# Altium PCB Board_QFP.PcbDoc (part 1 of 4)
Units mm, origin at the board's own origin, x right, y up, seen from the top; angles counter-clockwise.
Board outline 237 x 100 mm, 2 copper layers (Top Layer, Bottom Layer); 389 components, 358 nets, 1412 pads, 469 vias.
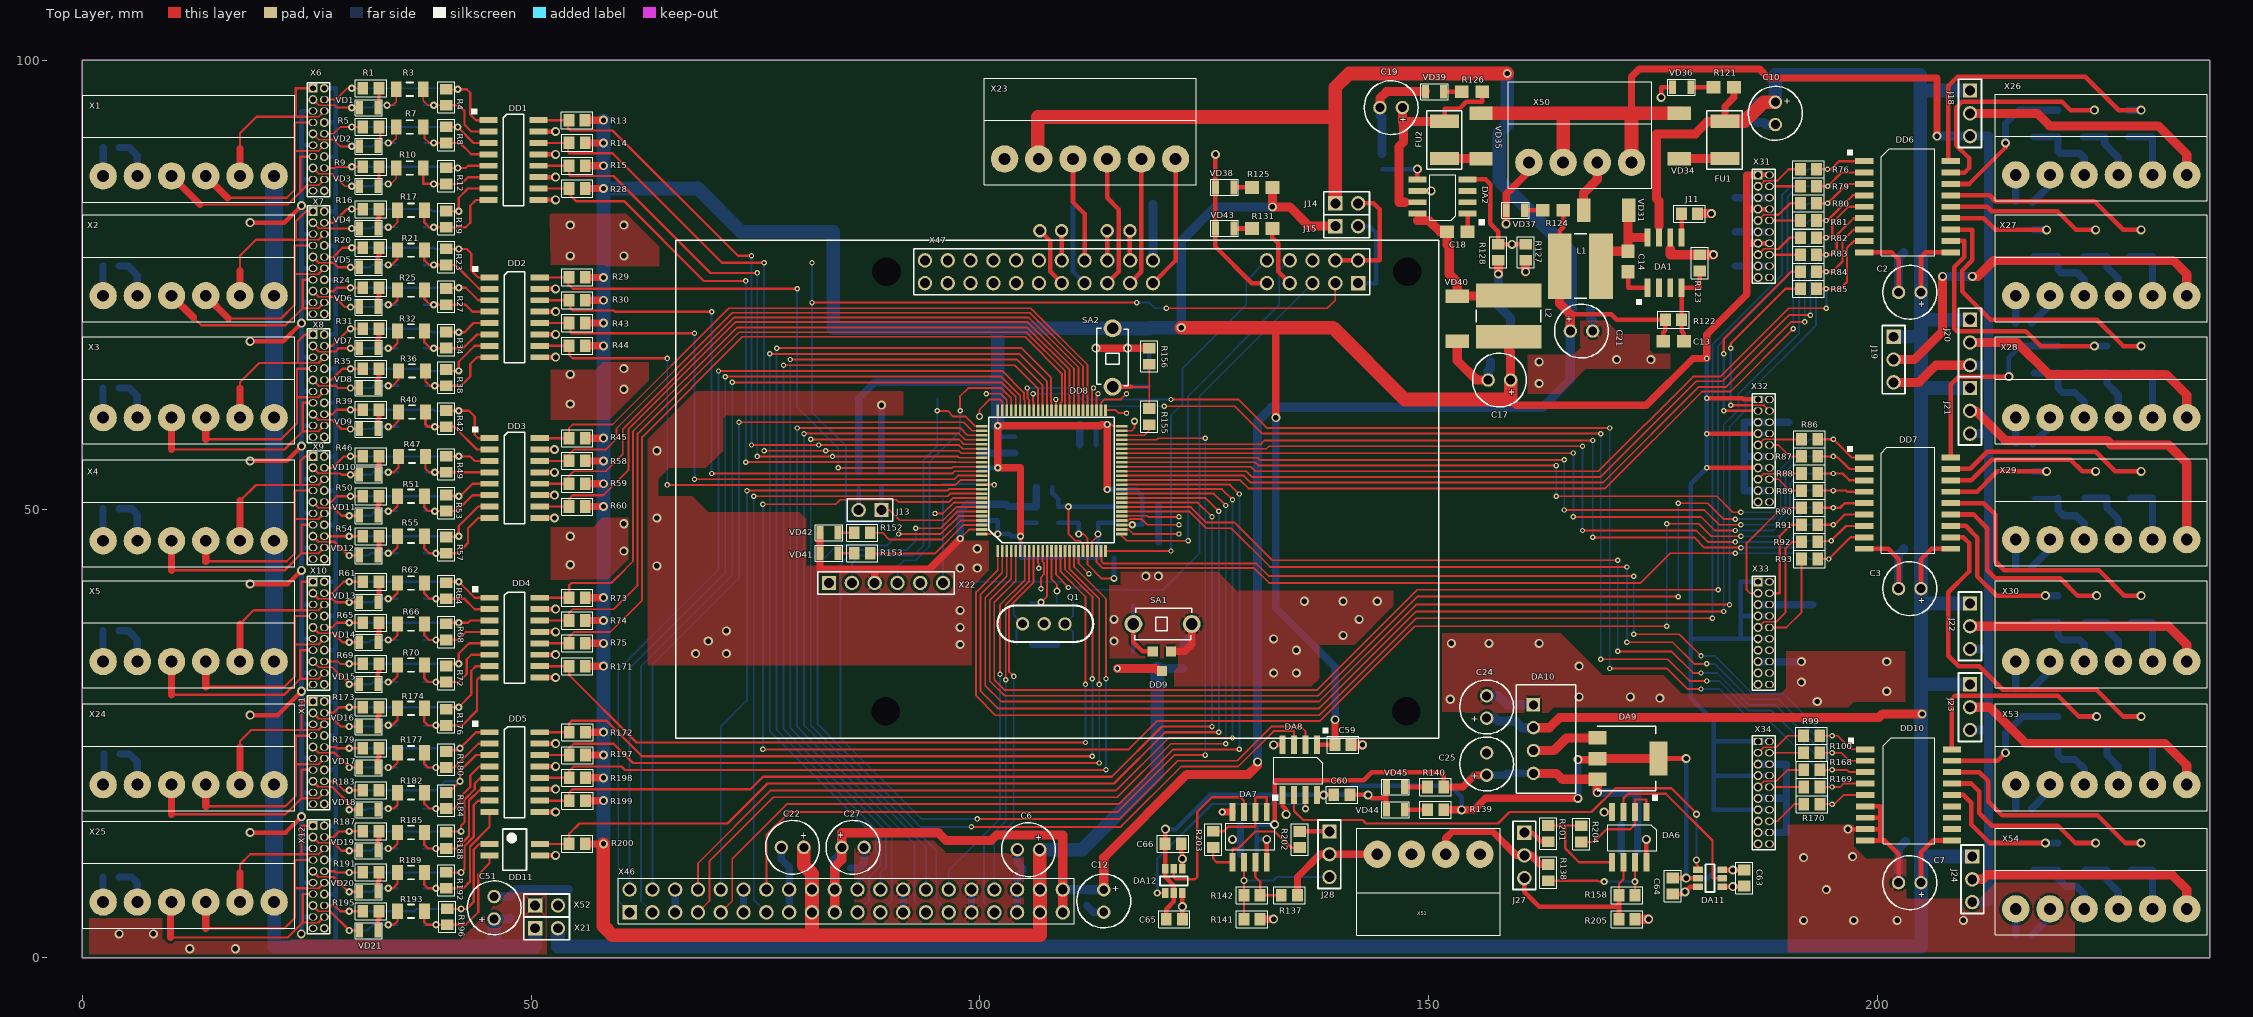
[diagram p0: Top Layer view]
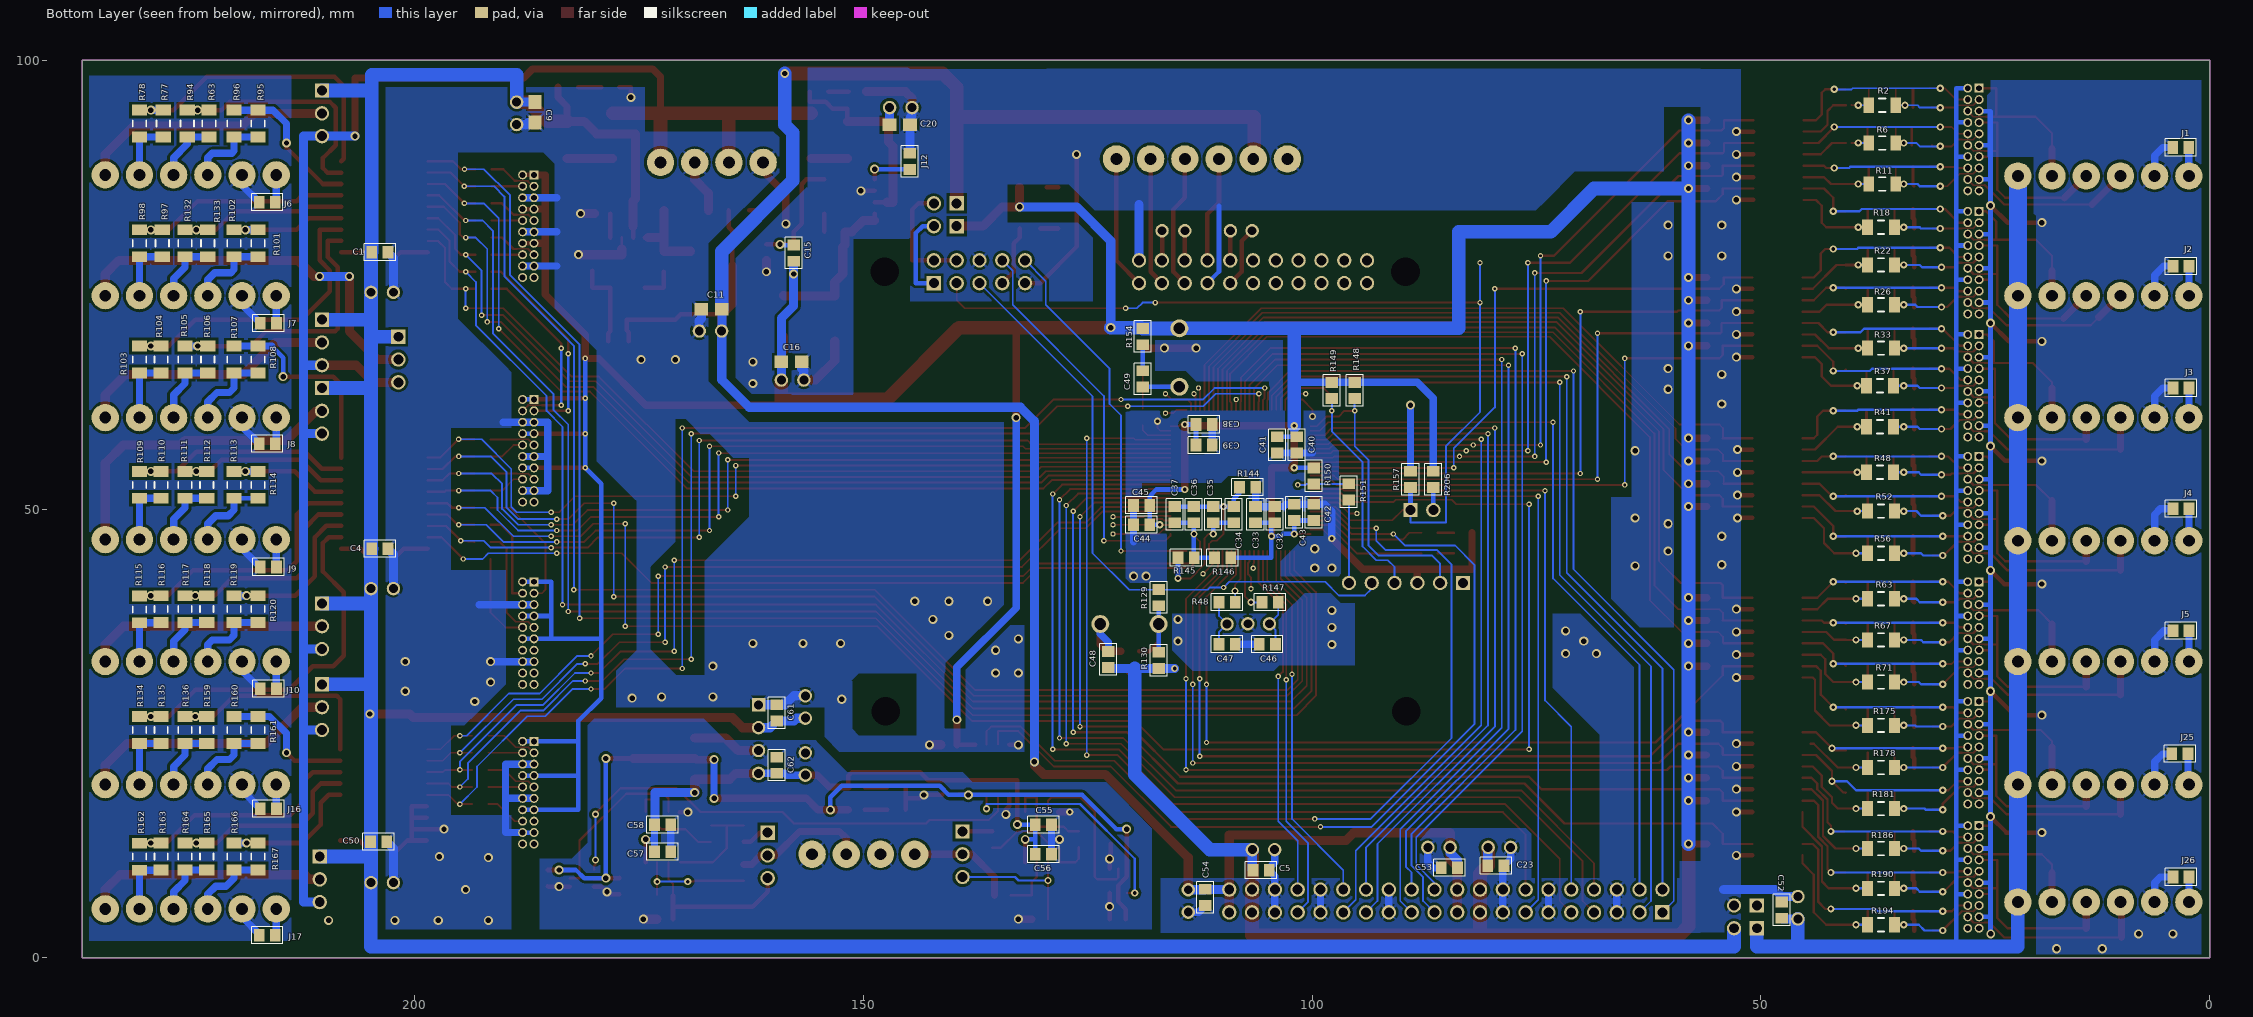
[diagram p1: Bottom Layer view, seen from below]
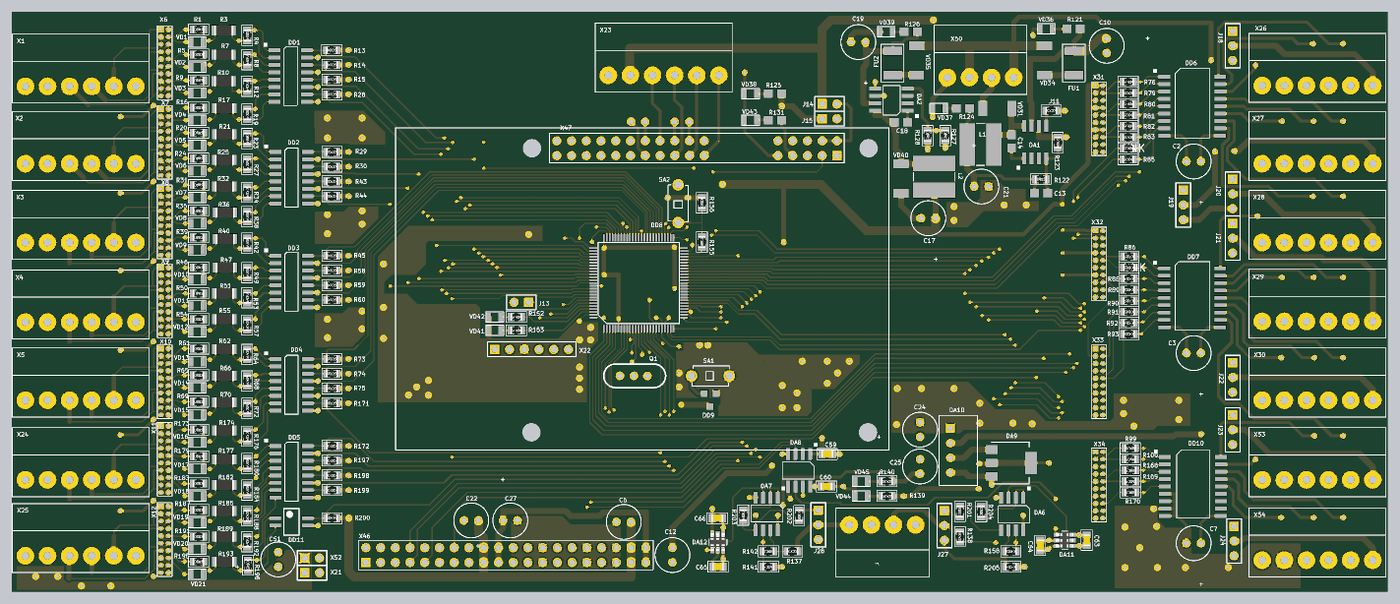
[diagram p5: 3D render of the assembled board from above, using the file's embedded part models]
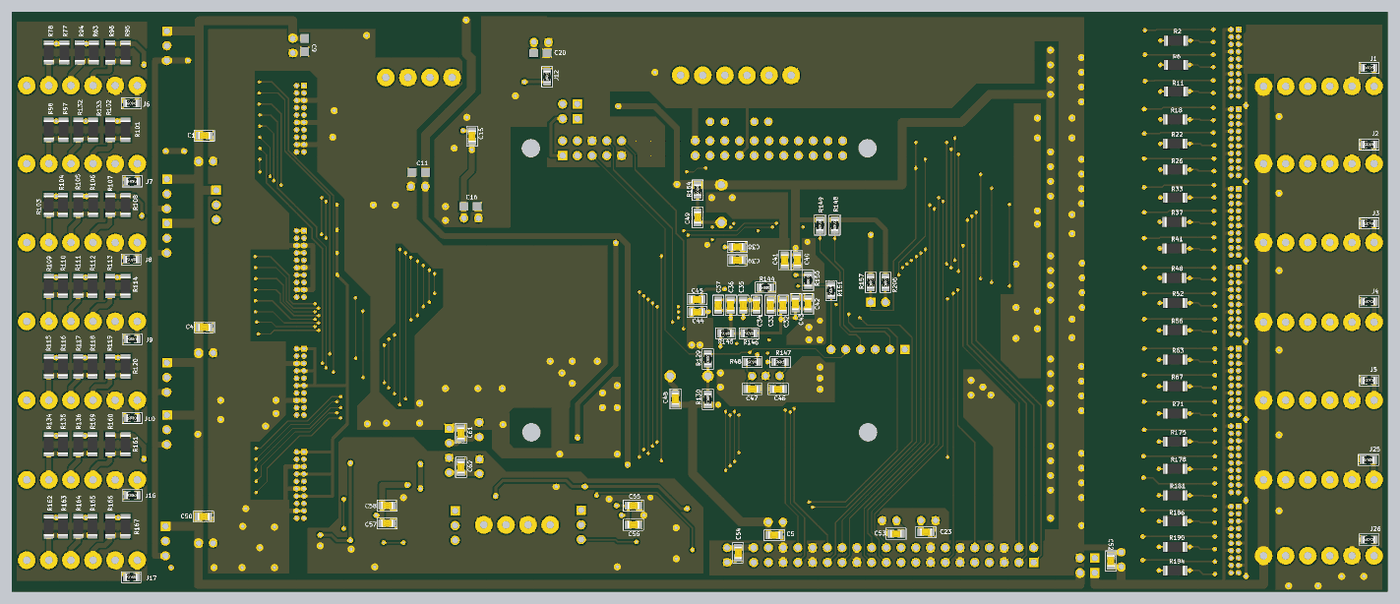
[diagram p6: 3D render of the assembled board from below, using the file's embedded part models]

## Layer stack, top to bottom
Top Solder: solder mask 0.0102, Solder Resist, Dk 3.5
Top Layer: signal copper 0.0356
Dielectric 1: dielectric 0.32, FR-4, Dk 4.8
Bottom Layer: signal copper 0.0356
Bottom Solder: solder mask 0.0102, Solder Resist, Dk 3.5

## Board outline
0,0 237,0 237,100 0,100

## Design rules (kind name [scope] priority, off if disabled: settings)
Clearance Clearance_Pol [Inpolygon] p1: gap=0.3
Clearance [All] p2: gap=0.15
ComponentClearance [All] p1: gap=0.2 collisioncheckmode=3 verticalgap=0.254 showdistances=FALSE
HoleSize [All] p1: absolutevalues=TRUE maxlimit=3.5 minlimit=0.25 maxpercent=80.000 minpercent=20.000
HoleToHoleClearance [All] p1: gap=0.2 allowstackedmicrovias=TRUE
MinimumSolderMaskSliver [All] p1: minsoldermaskwidth=0.1
MinimumSolderMaskSliver SilkscreenOverComponentPads [All] p2: minsoldermaskwidth=0.254
PlaneClearance [All] p1: clearance=0.305
PlaneConnect [All] p1: planeconnectstyle=Relief reliefexpansion=0.508 reliefentries=4 reliefconductorwidth=0.305 reliefairgap=0.254
PolygonConnect PolygonConnect_Via [IsVia] p1: connectstyle=Direct reliefconductorwidth=0.254 reliefentries=4 polygonreliefangle="90 Angle" airgapwidth=0.254
PolygonConnect [All] p2: connectstyle=Relief reliefconductorwidth=0.305 reliefentries=4 polygonreliefangle="45 Angle" airgapwidth=0.254
RoutingVias [All] p1: holewidth=0.4 width=0.8 viastyle="Through Hole" minholewidth=0.3 minwidth=0.6 maxholewidth=0.6 maxwidth=1
ShortCircuit [All] p1: allowed=TRUE
SilkToSilkClearance [All] p1: silktosilkclearance=0.102
SolderMaskExpansion [All] p1: expansion=0.1
Width [All] p1: maxlimit=2 minlimit=0.12 preferedwidth=0.2 minimp=50.000000 maximp=50.000000 favimp=50.000000
22 further rules are at their usual default settings.

## Components (designator, comment, footprint, x,y, rotation, side; value= is the part's Value field where it differs from the comment)
C1 "Comment" SMD0805CAP 204.872,78.618 r180 bottom
C2 "Comment" cap6 203.602,74.173 r180 top
C3 "Comment" cap6 203.602,41.153 r180 top
C4 "Comment" SMD0805CAP 204.872,45.598 r180 bottom
C5 "Comment" SMD0805CAP 106.68,9.779 r180 bottom
C6 "Comment" cap6 105.41,12.065 r180 top
C7 "Comment" cap6 203.602,8.387 r180 top
C9 "" RC0805 186.584,95.382 r270 bottom
C10 "Comment" cap6 188.616,94.112 r270 top
C11 "" RC0805 165.756,72.268 r0 bottom
C12 "Comment" cap6 113.792,6.35 r270 top
C13 "" RC0805 176.149,68.707 r0 top
C14 "" RC0805 172.212,76.454 r90 top
C15 "Comment" SMD0805CAP 157.757,79.532 r270 bottom
C16 "" RC0805 159.152,66.426 r180 bottom
C17 "Comment" cap6 157.882,64.394 r180 top
C18 "" RC0805 154.326,80.904 r180 top
C19 "Comment" cap6 145.817,94.747 r180 top
C20 "" RC0805 147.087,92.842 r180 bottom
C21 "Comment" cap6 167.026,69.855 r0 top
C22 "Comment" cap6 79.121,12.319 r180 top
C23 "Comment" SMD0805CAP 80.518,10.287 r180 bottom
C24 "Comment" cap6 156.459,27.961 r90 top
C25 "Comment" cap6 156.459,21.611 r90 top
C27 "Comment" cap6 85.852,12.319 r0 top
C32 "Comment" SMD0805CAP 104.14,48.387 r90 bottom
C33 "Comment" SMD0805CAP 106.299,48.387 r90 bottom
C34 "Comment" SMD0805CAP 108.712,48.387 r90 bottom
C35 "Comment" SMD0805CAP 110.998,48.387 r90 bottom
C36 "Comment" SMD0805CAP 113.157,48.387 r90 bottom
C37 "Comment" SMD0805CAP 115.316,48.387 r90 bottom
C38 "Comment" SMD0805CAP 113.03,59.436 r180 bottom
C39 "Comment" SMD0805CAP 113.03,57.15 r180 bottom
C40 "Comment" SMD0805CAP 101.727,58.166 r270 bottom
C41 "Comment" SMD0805CAP 103.886,58.166 r270 bottom
C42 "Comment" SMD0805CAP 99.822,48.641 r90 bottom
C43 "Comment" SMD0805CAP 101.981,48.641 r90 bottom
C44 "Comment" SMD0805CAP 117.983,48.26 r0 bottom
C45 "Comment" SMD0805CAP 117.983,50.419 r0 bottom
C46 "Comment" SMD0805CAP 103.984,34.951 r0 bottom
C47 "Comment" SMD0805CAP 110.461,34.951 r180 bottom
C48 "Comment" SMD0805CAP 122.682,32.258 r90 bottom
C49 "Comment" SMD0805CAP 118.872,65.532 r270 bottom
C50 "Comment" SMD0805CAP 204.999,12.959 r180 bottom
C51 "Comment" cap6 45.868,5.593 r90 top
C52 "Comment" SMD0805CAP 47.646,4.323 r90 bottom
C53 "Comment" SMD0805CAP 83.693,10.033 r0 bottom
C54 "Comment" SMD0805CAP 111.887,7.747 r270 bottom
C55 "Comment" SMD0805CAP 130.937,14.859 r180 bottom
C56 "Comment" SMD0805CAP 130.937,11.557 r180 bottom
C57 "Comment" SMD0805CAP 173.355,11.811 r180 bottom
C58 "Comment" SMD0805CAP 173.355,14.859 r180 bottom
C59 "Comment" SMD0805CAP 139.446,23.749 r0 top
C60 "Comment" SMD0805CAP 139.319,18.161 r0 top
C61 "Comment" SMD0805CAP 159.634,26.31 r90 bottom
C62 "Comment" SMD0805CAP 159.634,20.468 r90 bottom
C63 "Comment" SMD0805CAP 185.166,9.906 r270 top
C64 "Comment" SMD0805CAP 177.165,9.017 r270 top
C65 "Comment" SMD0805CAP 120.65,4.318 r0 top
C66 "Comment" SMD0805CAP 120.523,12.7 r0 top
DA1 "" SO8 174.371,74.676 r90 top
DA2 "" SO8 154.326,82.936 r180 top
DA6 "" SO8 174.244,16.256 r270 top
DA7 "" SO8 131.953,16.256 r270 top
DA8 "" SO8 137.541,23.749 r270 top
DA9 "Comment" SOT23 168.783,24.511 r270 top
DA10 "Comment" sip4 161.671,28.194 r270 top
DA11 "Comment" SOT23-6 181.356,8.89 r0 top
DA12 "Comment" SOT23-6 121.6,8.589 r90 top
DD1 "Comment" SO16 45.233,93.35 r0 top
DD2 "Comment" SO16 45.36,75.824 r0 top
DD3 "Comment" SO16 45.36,57.917 r0 top
DD4 "Comment" SO16 45.36,40.137 r0 top
DD5 "Comment" SO16 45.36,25.151 r0 top
DD6 "" SOL18 198.522,88.778 r0 top
DD7 "" SOL18 198.522,55.758 r0 top
DD8 "Comment" "LQFP100 - duplicate" 107.981,53.239 r90 top
DD9 "" SOT-23 121.285,34.163 r180 top
DD10 "" SOL18 198.649,23.246 r0 top
DD11 "Comment" SOIC4 48.154,12.07 r0 top
FU1 "" MSMF020 183.007,93.218 r270 top
FU2 "" MSMF020 151.765,93.218 r270 top
J1 "Comment" SMD0805RES 4.212,90.302 r180 bottom
J2 "Comment" SMD0805RES 2.18,77.094 r0 bottom
J3 "Comment" SMD0805RES 2.18,63.505 r0 bottom
J4 "Comment" SMD0805RES 2.18,50.043 r0 bottom
J5 "Comment" SMD0805RES 2.18,36.454 r0 bottom
J6 "Comment" SMD0805RES 215.413,84.206 r0 bottom
J7 "Comment" SMD0805RES 215.286,70.744 r0 bottom
J8 "Comment" SMD0805RES 215.413,57.282 r0 bottom
J9 "Comment" SMD0805RES 215.286,43.566 r0 bottom
J10 "Comment" SMD0805RES 215.286,29.977 r0 bottom
J11 "Comment" SMD0805RES 178.054,82.931 r0 top
J12 "Comment" SMD0805RES 144.801,87.762 r90 bottom
J13 "Comment" PLS2 89.027,49.911 r180 top
J14 "Comment" PLS2 139.594,84.079 r0 top
J15 "Comment" PLS2 139.594,81.539 r0 top
J16 "Comment" SMD0805RES 215.286,16.642 r0 bottom
J17 "Comment" SMD0805RES 215.413,2.545 r0 bottom
J18 "Comment" HDR1X3 210.312,96.647 r270 top
J19 "Comment" HDR1X3 201.803,69.215 r270 top
J20 "Comment" HDR1X3 210.312,71.12 r270 top
J21 "Comment" HDR1X3 210.312,63.5 r270 top
J22 "Comment" HDR1X3 210.312,39.497 r270 top
J23 "Comment" HDR1X3 210.312,30.48 r270 top
J24 "Comment" HDR1X3 210.566,11.303 r270 top
J25 "Comment" SMD0805RES 2.307,22.738 r0 bottom
J26 "Comment" SMD0805RES 2.18,9.022 r0 bottom
J27 "Comment" HDR1X3 160.655,13.97 r270 top
J28 "Comment" HDR1X3 138.938,14.097 r270 top
L1 "Comment" cdrh6d38np 164.592,77.089 r0 top
L2 "Comment" cdrh6d38np 158.898,69.22 r90 top
Q1 "" HC49_S 104.746,37.237 r270 top
R1 "Comment" SMD0805RES 31.136,96.906 r0 top
R2 "Comment" RES1206 36.47,95.001 r0 bottom
R3 "Comment" RES1206 36.47,96.779 r0 top
R4 "Comment" SMD0805RES 40.534,96.906 r270 top
R5 "Comment" SMD0805RES 31.136,92.588 r0 top
R6 "Comment" RES1206 36.47,90.81 r0 bottom
R7 "Comment" RES1206 36.47,92.588 r0 top
R8 "Comment" SMD0805RES 40.534,92.715 r270 top
R9 "Comment" SMD0805RES 31.136,88.143 r0 top
R10 "Comment" RES1206 36.47,88.016 r0 top
R11 "Comment" RES1206 36.47,86.238 r0 bottom
R12 "Comment" SMD0805RES 40.534,88.143 r270 top
R13 "Comment" SMD0805RES 54.096,93.35 r0 top
R14 "Comment" SMD0805RES 54.123,90.81 r0 top
R15 "Comment" SMD0805RES 54.123,88.27 r0 top
R16 "Comment" SMD0805RES 31.136,83.444 r0 top
R17 "Comment" RES1206 36.597,83.317 r0 top
R18 "Comment" RES1206 36.597,81.412 r0 bottom
R19 "Comment" SMD0805RES 40.534,83.317 r270 top
R20 "Comment" SMD0805RES 31.136,79.126 r0 top
R21 "Comment" RES1206 36.597,78.872 r0 top
R22 "Comment" RES1206 36.597,77.221 r0 bottom
R23 "Comment" SMD0805RES 40.534,79.126 r270 top
R24 "Comment" SMD0805RES 31.136,74.681 r0 top
R25 "Comment" RES1206 36.597,74.427 r0 top
R26 "Comment" RES1206 36.597,72.776 r0 bottom
R27 "Comment" SMD0805RES 40.534,74.681 r270 top
R28 "Comment" SMD0805RES 54.123,85.73 r0 top
R29 "Comment" SMD0805RES 54.123,75.824 r0 top
R30 "Comment" SMD0805RES 54.123,73.284 r0 top
R31 "Comment" SMD0805RES 31.136,70.109 r0 top
R32 "Comment" RES1206 36.597,69.855 r0 top
R33 "Comment" RES1206 36.597,67.95 r0 bottom
R34 "Comment" SMD0805RES 40.534,69.855 r270 top
R35 "Comment" SMD0805RES 31.136,65.664 r0 top
R36 "Comment" RES1206 36.724,65.41 r0 top
R37 "Comment" RES1206 36.724,63.759 r0 bottom
R38 "Comment" SMD0805RES 40.534,65.664 r270 top
R39 "Comment" SMD0805RES 31.136,61.092 r0 top
R40 "Comment" RES1206 36.724,60.838 r0 top
R41 "Comment" RES1206 36.724,59.187 r0 bottom
R42 "Comment" SMD0805RES 40.534,61.092 r270 top
R43 "Comment" SMD0805RES 54.123,70.744 r0 top
R44 "Comment" SMD0805RES 54.123,68.204 r0 top
R45 "Comment" SMD0805RES 54.123,57.917 r0 top
R46 "Comment" SMD0805RES 31.136,55.885 r0 top
R47 "Comment" RES1206 36.724,55.885 r0 top
R48 "Comment" SMD0805RES 108.458,39.624 r0 bottom
R48 "Comment" RES1206 36.724,54.107 r0 bottom
R49 "Comment" SMD0805RES 40.534,56.012 r270 top
R50 "Comment" SMD0805RES 31.136,51.44 r0 top
R51 "Comment" RES1206 36.597,51.44 r0 top
R52 "Comment" RES1206 36.597,49.789 r0 bottom
R53 "Comment" SMD0805RES 40.534,51.694 r270 top
R54 "Comment" SMD0805RES 31.136,46.995 r0 top
R55 "Comment" RES1206 36.597,46.995 r0 top
R56 "Comment" RES1206 36.597,45.09 r0 bottom
R57 "Comment" SMD0805RES 40.534,46.995 r270 top
R58 "Comment" SMD0805RES 54.123,55.377 r0 top
R59 "Comment" SMD0805RES 54.123,52.837 r0 top
R60 "Comment" SMD0805RES 54.123,50.297 r0 top
R61 "Comment" SMD0805RES 31.136,41.915 r0 top
R62 "Comment" RES1206 36.597,41.788 r0 top
R63 "Comment" RES1206 222.906,92.969 r90 bottom
R63 "Comment" RES1206 36.597,40.01 r0 bottom
R64 "Comment" SMD0805RES 40.534,41.915 r270 top
R65 "Comment" SMD0805RES 31.136,37.343 r0 top
R66 "Comment" RES1206 36.597,37.216 r0 top
R67 "Comment" RES1206 36.597,35.438 r0 bottom
R68 "Comment" SMD0805RES 40.534,37.343 r270 top
R69 "Comment" SMD0805RES 31.136,32.771 r0 top
R70 "Comment" RES1206 36.597,32.644 r0 top
R71 "Comment" RES1206 36.597,30.739 r0 bottom
R72 "Comment" SMD0805RES 40.534,32.644 r270 top
R73 "Comment" SMD0805RES 54.123,40.137 r0 top
R74 "Comment" SMD0805RES 54.123,37.597 r0 top
R75 "Comment" SMD0805RES 54.123,35.057 r0 top
R76 "Comment" SMD0805RES 193.315,87.889 r180 top
R77 "Comment" RES1206 227.986,92.969 r90 bottom
R78 "Comment" RES1206 230.653,92.969 r90 bottom
R79 "Comment" SMD0805RES 193.315,85.984 r180 top
R80 "Comment" SMD0805RES 193.315,84.079 r180 top
R81 "Comment" SMD0805RES 193.315,82.174 r180 top
R82 "Comment" SMD0805RES 193.315,80.269 r180 top
R83 "Comment" SMD0805RES 193.315,78.364 r180 top
R84 "Comment" SMD0805RES 193.315,76.459 r180 top
R85 "Comment" SMD0805RES 193.315,74.554 r180 top
R86 "Comment" SMD0805RES 193.442,57.79 r180 top
R87 "Comment" SMD0805RES 193.442,55.885 r180 top
R88 "Comment" SMD0805RES 193.442,53.98 r180 top
R89 "Comment" SMD0805RES 193.442,52.075 r180 top
R90 "Comment" SMD0805RES 193.442,50.17 r180 top
R91 "Comment" SMD0805RES 193.442,48.265 r180 top
R92 "Comment" SMD0805RES 193.442,46.36 r180 top
R93 "Comment" SMD0805RES 193.442,44.455 r180 top
R94 "Comment" RES1206 225.319,92.969 r90 bottom
R95 "Comment" RES1206 217.445,92.969 r90 bottom
R96 "Comment" RES1206 220.112,92.969 r90 bottom
R97 "Comment" RES1206 228.113,79.634 r90 bottom
R98 "Comment" RES1206 230.653,79.634 r90 bottom
R99 "Comment" SMD0805RES 193.672,24.767 r180 top
R100 "Comment" SMD0805RES 193.672,22.862 r180 top
R101 "Comment" RES1206 217.445,79.634 r90 bottom
R102 "Comment" RES1206 220.112,79.634 r90 bottom
R103 "Comment" RES1206 230.653,66.68 r90 bottom
R104 "Comment" RES1206 228.24,66.68 r90 bottom
R105 "Comment" RES1206 225.573,66.68 r90 bottom
R106 "Comment" RES1206 223.033,66.68 r90 bottom
R107 "Comment" RES1206 220.112,66.68 r90 bottom
R108 "Comment" RES1206 217.445,66.68 r90 bottom
R109 "Comment" RES1206 230.653,52.71 r90 bottom
R110 "Comment" RES1206 228.24,52.71 r90 bottom
R111 "Comment" RES1206 225.573,52.71 r90 bottom
R112 "Comment" RES1206 223.16,52.71 r90 bottom
R113 "Comment" RES1206 220.112,52.71 r90 bottom
R114 "Comment" RES1206 217.445,52.71 r90 bottom
R115 "Comment" RES1206 230.653,38.843 r90 bottom
R116 "Comment" RES1206 228.24,38.867 r90 bottom
R117 "Comment" RES1206 225.573,38.867 r90 bottom
R118 "Comment" RES1206 223.16,38.867 r90 bottom
R119 "Comment" RES1206 220.112,38.867 r90 bottom
R120 "Comment" RES1206 217.445,38.867 r90 bottom
R121 "" RC0805 181.737,97.028 r0 top
R122 "Comment" SMD0805RES 176.276,71.12 r0 top
R123 "Comment" SMD0805RES 180.213,76.454 r90 top
R124 "" RC0805 162.708,83.317 r0 top
R125 "" RC0805 130.302,85.852 r0 top
R126 "" RC0805 153.691,96.525 r0 top
R127 "Comment" SMD0805RES 160.803,79.634 r270 top
R128 "Comment" SMD0805RES 157.755,79.634 r270 top
R129 "Comment" SMD0805RES 117.094,41.148 r270 bottom
R130 "Comment" SMD0805RES 117.094,34.163 r270 bottom
R131 "" RC0805 132.588,81.28 r180 top
R132 "Comment" RES1206 225.573,79.634 r90 bottom
R133 "Comment" RES1206 223.033,79.634 r90 bottom
R134 "Comment" RES1206 230.653,25.405 r90 bottom
R135 "Comment" RES1206 228.24,25.405 r90 bottom
R136 "Comment" RES1206 225.573,25.405 r90 bottom
R137 "Comment" SMD0805RES 133.477,6.985 r0 top
R138 "Comment" SMD0805RES 163.322,8.509 r90 top
R139 "Comment" SMD0805RES 151.765,16.51 r180 top
R140 "Comment" SMD0805RES 151.765,19.05 r180 top
R141 "Comment" SMD0805RES 131.318,4.318 r180 top
R142 "Comment" SMD0805RES 131.318,6.985 r180 top
R144 "Comment" SMD0805RES 106.172,52.451 r0 bottom
R145 "Comment" SMD0805RES 113.03,44.577 r0 bottom
R146 "Comment" SMD0805RES 108.966,44.577 r0 bottom
R147 "Comment" SMD0805RES 105.664,39.624 r180 bottom
R148 "Comment" SMD0805RES 95.25,62.23 r90 bottom
R149 "Comment" SMD0805RES 97.79,62.23 r90 bottom
R150 "Comment" SMD0805RES 99.822,52.705 r90 bottom
R151 "Comment" SMD0805RES 95.885,50.927 r90 bottom
R152 "Comment" SMD0805RES 87.884,47.371 r180 top
R153 "Comment" SMD0805RES 87.884,45.085 r180 top
R154 "Comment" SMD0805RES 118.872,70.231 r270 bottom
R155 "Comment" SMD0805RES 118.872,59.309 r90 top
R156 "Comment" SMD0805RES 118.872,66.04 r90 top
R157 "Comment" SMD0805RES 89.027,52.324 r90 bottom
R158 "Comment" SMD0805RES 173.101,6.985 r180 top
R159 "Comment" RES1206 223.16,25.405 r90 bottom
R160 "Comment" RES1206 220.112,25.405 r90 bottom
R161 "Comment" RES1206 217.445,25.405 r90 bottom
R162 "Comment" RES1206 230.653,11.284 r90 bottom
R163 "Comment" RES1206 228.24,11.308 r90 bottom
R164 "Comment" RES1206 225.573,11.308 r90 bottom
R165 "Comment" RES1206 223.16,11.308 r90 bottom
R166 "Comment" RES1206 220.112,11.308 r90 bottom
R167 "Comment" RES1206 217.445,11.308 r90 bottom
R168 "Comment" SMD0805RES 193.697,20.955 r180 top
R169 "Comment" SMD0805RES 193.697,19.05 r180 top
R170 "Comment" SMD0805RES 193.697,17.145 r180 top
R171 "Comment" SMD0805RES 54.123,32.517 r0 top
R172 "Comment" SMD0805RES 54.148,25.149 r0 top
R173 "Comment" SMD0805RES 31.136,27.945 r0 top
R174 "Comment" RES1206 36.597,27.818 r0 top
R175 "Comment" RES1206 36.597,25.913 r0 bottom
R176 "Comment" SMD0805RES 40.534,27.818 r270 top
R177 "Comment" RES1206 36.597,22.865 r0 top
R178 "Comment" RES1206 36.597,21.214 r0 bottom
R179 "Comment" SMD0805RES 31.136,23.373 r0 top
R180 "Comment" SMD0805RES 40.534,23.119 r270 top
R181 "Comment" RES1206 36.597,16.642 r0 bottom
R182 "Comment" RES1206 36.597,18.42 r0 top
R183 "Comment" SMD0805RES 31.136,18.674 r0 top
R184 "Comment" SMD0805RES 40.534,18.547 r270 top
R185 "Comment" RES1206 36.597,13.975 r0 top
R186 "Comment" RES1206 36.597,12.197 r0 bottom
R187 "Comment" SMD0805RES 31.136,14.102 r0 top
R188 "Comment" SMD0805RES 40.534,14.102 r270 top
R189 "Comment" RES1206 36.597,9.53 r0 top
R190 "Comment" RES1206 36.597,7.752 r0 bottom
R191 "Comment" SMD0805RES 31.136,9.53 r0 top
R192 "Comment" SMD0805RES 40.534,9.657 r270 top
R193 "Comment" RES1206 36.597,5.212 r0 top
R194 "Comment" RES1206 36.597,3.688 r0 bottom
R195 "Comment" SMD0805RES 31.136,5.212 r0 top
R196 "Comment" SMD0805RES 40.661,5.593 r270 top
R197 "Comment" SMD0805RES 54.148,22.609 r0 top
R198 "Comment" SMD0805RES 54.148,20.069 r0 top
R199 "Comment" SMD0805RES 54.148,17.529 r0 top
R200 "Comment" SMD0805RES 54.123,12.705 r0 top
R201 "Comment" SMD0805RES 163.322,14.859 r270 top
R202 "Comment" SMD0805RES 135.636,12.192 r90 top
R203 "Comment" SMD0805RES 125.984,14.224 r270 top
R204 "Comment" SMD0805RES 167.005,12.827 r90 top
R205 "Comment" SMD0805RES 173.101,4.318 r180 top
R206 "Comment" SMD0805RES 86.487,52.324 r90 bottom
SA1 "Comment" SWT-1 117.094,37.211 r0 top
SA2 "Comment" SWT-1 114.779,63.653 r90 top
VD1 "" KP2012 30.882,94.747 r270 top
VD2 "" KP2012 30.882,90.429 r270 top
VD3 "" KP2012 30.882,85.984 r270 top
VD4 "" KP2012 30.882,81.285 r270 top
VD5 "" KP2012 30.882,76.967 r270 top
VD6 "" KP2012 30.882,72.522 r270 top
VD7 "" KP2012 30.882,67.95 r270 top
VD8 "" KP2012 30.882,63.505 r270 top
VD9 "" KP2012 30.882,58.933 r270 top
VD10 "" KP2012 30.882,53.853 r270 top
VD11 "" KP2012 30.882,49.281 r270 top
VD12 "" KP2012 30.882,44.836 r270 top
VD13 "" KP2012 30.882,39.629 r270 top
VD14 "" KP2012 30.882,35.184 r270 top
VD15 "" KP2012 30.882,30.485 r270 top
VD16 "" KP2012 30.882,25.786 r270 top
VD17 "" KP2012 30.882,21.214 r270 top
VD18 "" KP2012 30.882,16.515 r270 top
VD19 "" KP2012 30.882,11.943 r270 top
VD20 "" KP2012 30.882,7.371 r270 top
VD21 "" KP2012 30.882,3.053 r270 top
VD31 "" MELF 167.259,83.312 r0 top
VD34 "" MELF 177.927,94.107 r270 top
VD35 "" MELF 155.829,94.107 r270 top
VD36 "" KP2012 179.197,97.028 r90 top
VD37 "" KP2012 160.676,83.317 r90 top
VD38 "" KP2012 128.27,85.852 r90 top
VD39 "" KP2012 151.659,96.525 r90 top
VD40 "" MELF 153.183,68.712 r90 top
VD41 "" KP2012 82.169,45.085 r270 top
VD42 "" KP2012 82.169,47.371 r270 top
VD43 "" KP2012 126.238,81.28 r270 top
VD44 "" KP2012 147.32,16.51 r90 top
VD45 "" KP2012 147.32,19.05 r90 top
X1 "" 15EDGVC_081_6 21.357,87.127 r180 top
X2 "" 15EDGVC_081_6 21.357,73.792 r180 top
X3 "" 15EDGVC_081_6 21.357,60.203 r180 top
X4 "" 15EDGVC_081_6 21.357,46.487 r180 top
X5 "" 15EDGVC_081_6 21.357,33.025 r180 top
X6 "Comment" pld2x10_1.27#1 25.675,96.906 r0 top
X7 "Comment" pld2x10_1.27#1 25.675,83.19 r0 top
X8 "Comment" pld2x10_1.27#1 25.675,69.474 r0 top
X9 "Comment" pld2x10_1.27#1 25.675,55.885 r0 top
X10 "Comment" pld2x10_1.27#1 25.675,41.915 r0 top
X11 "Comment" pld2x10_1.27#1 25.675,28.58 r0 top
X12 "Comment" pld2x10_1.27#1 25.675,14.737 r0 top
X21 "Comment" HDR1X2 50.44,3.307 r0 top
X22 "Comment" PLS6 83.185,41.783 r0 top
X23 "" 15EDGVC_081_6 121.793,89.027 r180 top
X24 "" 15EDGVC_081_6 21.357,19.309 r180 top
X25 "" 15EDGVC_081_6 21.357,6.228 r180 top
X26 "" 15EDGVC_081_6 234.463,87.254 r180 top
X27 "" 15EDGVC_081_6 234.463,73.792 r180 top
X28 "" 15EDGVC_081_6 234.463,60.203 r180 top
X29 "" 15EDGVC_081_6 234.463,46.614 r180 top
X30 "" 15EDGVC_081_6 234.463,33.025 r180 top
X31 "Comment" pld2x10_1.27#2 186.69,87.249 r0 top
X32 "Comment" pld2x10_1.27#3 186.69,62.23 r0 top
X33 "Comment" pld2x10_1.27#2 186.69,41.91 r0 top
X34 "Comment" pld2x10_1.27#3 186.69,24.13 r0 top
X46 "Comment" PLD40_n 60.96,5.08 r0 top
X47 "Comment" PLD40 142.134,77.729 r180 top
X50 "" 15EDGVC_081_4 172.593,88.646 r180 top
X51 "" 15EDGVC_081_4 144.272,11.557 r0 top
X52 "Comment" HDR1X2 50.44,5.847 r0 top
X53 "" 15EDGVC_081_6 234.463,19.309 r180 top
X54 "" 15EDGVC_081_6 234.463,5.466 r180 top

## Footprints (in the part's own frame and the unit in brackets; to place one, negate y for a bottom-side part, rotate by r counter-clockwise, add the part's x,y. Pads: shape width x height; smd on the part's side, far side on the other; paste and mask are expansions set on the pad)
15EDGVC_081_4 [mil]
  round 120 hole 52: 1(0,0) 2(150,0) 3(300,0) 4(450,0)
  silkscreen extent -90,-354 540,114
15EDGVC_081_6 [mil]
  round 120 hole 52: 1(0,0) 2(150,0) 3(300,0) 4(450,0) 5(600,0) 6(750,0)
  silkscreen extent -90,-354 839,114
cap6 [mm]
  round 1.5 hole 1 mask+0.1: 1(-1.25,0) 2(1.25,0)
  silkscreen extent -3,-3 3,3
cdrh6d38np [mm]
  rect 2.65x7.3 smd: 1(0,0) 2(4.6,0)
  silkscreen extent 1.6,-3.6 3,3.6
HC49_S [mm]
  round 1.5 hole 1: 1(0,0) 2(0.025,4.724)
  silkscreen extent -2.03,-2.79 2.03,7.87
HDR1X2 [mm] "Connector; Header; 2 Position"
  rect 1.6x1.6 hole 1.1: 1(0,0)
  round 1.6 hole 1.1: 2(2.54,0)
  silkscreen extent -1.27,-1.27 3.81,1.27
HDR1X3 [mm] "Connector; Header; 3 Position"
  rect 1.6x1.6 hole 1.1: 1(0,0)
  round 1.6 hole 1.1: 2(2.54,0) 3(5.08,0)
  silkscreen extent -1.27,-1.27 6.35,1.27
KP2012 [mil]
  rect 60x30 smd: 1(0,0) 2(0,80)
  silkscreen extent -35,-20 35,100
"LQFP100 - duplicate" [mm] "TSQFP, 100-Leads, Body 14,00x14,00mm, Pitch 0,50mm, IPC Medium Density"
  rect 1.3x0.3 smd: 1(-7.9,6) 2(-7.9,5.5) 3(-7.9,5) 4(-7.9,4.5) 5(-7.9,4) 6(-7.9,3.5) 7(-7.9,3) 8(-7.9,2.5) 9(-7.9,2) 10(-7.9,1.5) 11(-7.9,1) 12(-7.9,0.5) 13(-7.9,0) 14(-7.9,-0.5) 15(-7.9,-1) 16(-7.9,-1.5) 17(-7.9,-2) 18(-7.9,-2.5) 19(-7.9,-3) 20(-7.9,-3.5) 21(-7.9,-4) 22(-7.9,-4.5) 23(-7.9,-5) 24(-7.9,-5.5) 25(-7.9,-6) 51(7.8,-6) 52(7.8,-5.5) 53(7.8,-5) 54(7.8,-4.5) 55(7.8,-4) 56(7.8,-3.5) 57(7.8,-3) 58(7.8,-2.5) 59(7.8,-2) 60(7.8,-1.5) 61(7.8,-1) 62(7.8,-0.5) 63(7.8,0) 64(7.8,0.5) 65(7.8,1) 66(7.8,1.5) 67(7.8,2) 68(7.8,2.5) 69(7.8,3) 70(7.8,3.5) 71(7.8,4) 72(7.8,4.5) 73(7.8,5) 74(7.8,5.5) 75(7.8,6)
  rect 0.3x1.3 smd: 26(-6,-7.8) 27(-5.5,-7.8) 28(-5,-7.8) 29(-4.5,-7.8) 30(-4,-7.8) 31(-3.5,-7.8) 32(-3,-7.8) 33(-2.5,-7.8) 34(-2,-7.8) 35(-1.5,-7.8) 36(-1,-7.8) 37(-0.5,-7.8) 38(0,-7.8) 39(0.5,-7.8) 40(1,-7.8) 41(1.5,-7.8) 42(2,-7.8) 43(2.5,-7.8) 44(3,-7.8) 45(3.5,-7.8) 46(4,-7.8) 47(4.5,-7.8) 48(5,-7.8) 49(5.5,-7.8) 50(6,-7.8) 76(6,7.8) 77(5.5,7.8) 78(5,7.8) 79(4.5,7.8) 80(4,7.8) 81(3.5,7.8) 82(3,7.8) 83(2.5,7.8) 84(2,7.8) 85(1.5,7.8) 86(1,7.8) 87(0.5,7.8) 88(0,7.8) 89(-0.5,7.8) 90(-1,7.8) 91(-1.5,7.8) 92(-2,7.8) 93(-2.5,7.8) 94(-3,7.8) 95(-3.5,7.8) 96(-4,7.8) 97(-4.5,7.8) 98(-5,7.8) 99(-5.5,7.8) 100(-6,7.8)
  silkscreen extent -7,-7 7,7, body extent -7,-7 7,7, height 1.6
MELF [mm]
  rect 1.5x2.6 smd: 1(5.04,0) 2(0,0)
MSMF020 [mm]
  rect 1.5x3.2 smd: 1(0,0) 2(4.14,0)
  silkscreen extent -1.16,-2 5.34,1.9
pld2x10_1.27#1 [mm]
  rect 1x1 hole 0.65 mask+0.1: 1(0,0)
  round 1 hole 0.65 mask+0.1: 2(1.27,0) 3(0,-1.27) 8(1.27,-3.81) 9(0,-5.08) 14(1.27,-7.62) 15(0,-8.89) 20(1.27,-11.43)
  oval 1x0.8 / inner round 1 / far side round 1 hole 0.65 mask+0.1: 4(1.27,-1.27) 5(0,-2.54) 6(1.27,-2.54) 7(0,-3.81) 10(1.27,-5.08) 11(0,-6.35) 12(1.27,-6.35) 13(0,-7.62) 16(1.27,-8.89) 17(0,-10.16) 18(1.27,-10.16) 19(0,-11.43)
  silkscreen extent -0.64,-12.06 1.91,0.64
pld2x10_1.27#2 [mm]
  rect 1x1 hole 0.65 mask+0.1: 1(0,0)
  oval 1x0.8 / inner round 1 / far side round 1 hole 0.65 mask+0.1: 2(1.27,0) 4(1.27,-1.27) 6(1.27,-2.54) 8(1.27,-3.81) 10(1.27,-5.08) 12(1.27,-6.35) 14(1.27,-7.62) 16(1.27,-8.89) 18(1.27,-10.16) 20(1.27,-11.43)
  round 1 hole 0.65 mask+0.1: 3(0,-1.27) 5(0,-2.54) 7(0,-3.81) 9(0,-5.08) 11(0,-6.35) 13(0,-7.62) 15(0,-8.89) 17(0,-10.16) 19(0,-11.43)
  silkscreen extent -0.64,-12.06 1.91,0.64
pld2x10_1.27#3 [mm]
  rect 1x0.8 / inner rect 1x1 / far side rect 1x1 hole 0.65 mask+0.1: 1(0,0)
  oval 1x0.8 / inner round 1 / far side round 1 hole 0.65 mask+0.1: 2(1.27,0) 3(0,-1.27) 4(1.27,-1.27) 6(1.27,-2.54) 8(1.27,-3.81) 10(1.27,-5.08) 12(1.27,-6.35) 14(1.27,-7.62) 16(1.27,-8.89) 18(1.27,-10.16) 20(1.27,-11.43)
  round 1 hole 0.65 mask+0.1: 5(0,-2.54) 7(0,-3.81) 9(0,-5.08) 11(0,-6.35) 13(0,-7.62) 15(0,-8.89) 17(0,-10.16) 19(0,-11.43)
  silkscreen extent -0.64,-12.06 1.91,0.64
PLD40 [mm]
  rect 1.6x1.6 hole 1.1 mask+0.1: 1(0,2.54)
  round 1.6 hole 1.1 mask+0.1: 2(0,0) 3(2.54,2.54) 4(2.54,0) 5(5.08,2.54) 6(5.08,0) 7(7.62,2.54) 8(7.62,0) 9(10.16,2.54) 10(10.16,0) 19(22.86,2.54) 20(22.86,0) 21(25.4,2.54) 22(25.4,0) 23(27.94,2.54) 24(27.94,0) 25(30.48,2.54) 26(30.48,0) 27(33.02,2.54) 28(33.02,0) 29(35.56,2.54) 30(35.56,0) 31(38.1,2.54) 32(38.1,0) 33(40.64,2.54) 34(40.64,0) 35(43.18,2.54) 36(43.18,0) 37(45.72,2.54) 38(45.72,0) 39(48.26,2.54) 40(48.26,0)
  round 0 all layers, no hole mask+0.1: 11(12.7,0) 12(12.7,2.54) 13(15.24,0) 14(15.24,2.54) 15(17.78,0) 16(17.78,2.54) 17(20.32,0) 18(20.32,2.54)
  silkscreen extent -1.27,-1.27 49.53,3.81
PLD40_n [mm]
  rect 1.6x1.6 hole 1.1 mask+0.1: 1(0,0)
  round 1.6 hole 1.1 mask+0.1: 2(0,2.54) 3(2.54,0) 4(2.54,2.54) 5(5.08,0) 6(5.08,2.54) 7(7.62,0) 8(7.62,2.54) 9(10.16,0) 10(10.16,2.54) 11(12.7,0) 12(12.7,2.54) 13(15.24,0) 14(15.24,2.54) 15(17.78,0) 16(17.78,2.54) 17(20.32,0) 18(20.32,2.54) 19(22.86,0) 20(22.86,2.54) 21(25.4,0) 22(25.4,2.54) 23(27.94,0) 24(27.94,2.54) 25(30.48,0) 26(30.48,2.54) 27(33.02,0) 28(33.02,2.54) 29(35.56,0) 30(35.56,2.54) 31(38.1,0) 32(38.1,2.54) 33(40.64,0) 34(40.64,2.54) 35(43.18,0) 36(43.18,2.54) 37(45.72,0) 38(45.72,2.54) 39(48.26,0) 40(48.26,2.54)
  silkscreen extent -1.27,-1.27 49.53,3.81
PLS2 [mm]
  rect 1.6x1.6 hole 1.1: 1(0,0)
  round 1.6 hole 1.1: 2(2.54,0)
  silkscreen extent -1.27,-1.27 3.81,1.27
PLS6 [mm]
  rect 1.6x1.6 hole 1.1 unplated: 1(0,0)
  round 1.6 hole 1.1: 2(2.54,0) 3(5.08,0) 4(7.62,0) 5(10.16,0) 6(12.7,0)
  silkscreen extent -1.27,-1.27 13.97,1.27
RC0805 [mil]
  rect 60x56 smd: 1(0,0) 2(90,0)
RES1206 [mm] "Chip Resistor, 2-Leads, Body 3,10x1,60mm, IPC Medium Density"
  rect 1.2x1.7 smd: 1(-1.5,0) 2(1.5,0)
  silkscreen extent -0.35,-0.75 0.35,0.75, body extent -1.6,-0.85 1.6,0.85, height 0.6
sip4 [mm]
  rect 1.5x1.5 hole 1: 1(0,0)
  round 1.5 hole 1: 2(2.54,0) 3(5.08,0) 4(7.62,0)
  silkscreen extent -2.22,-1.91 9.84,4.7
SMD0805CAP [mm] "Чипконденсатор, 2.0x1.3mm"
  rect 1.2x1.4 smd: 1(0.102,0.002) 2(1.902,0.002)
  silkscreen extent -0.75,-0.95 2.75,0.95, body extent 0,-0.6 2,0.65, height 0.51
SMD0805RES [mm] "Чипрезистор, 2.0x1.3mm"
  rect 1.2x1.4 smd: 1(0.102,0.002) 2(1.902,0.002)
  silkscreen extent -0.75,-0.95 2.75,0.95, body extent 0,-0.63 2,0.63, height 0.51
SO8 [mil]
  rect 80x26 smd: 1(0,0) 2(0,-50) 3(0,-100) 4(0,-150) 5(220,-150) 6(220,-100) 7(220,-50) 8(220,0)
  silkscreen extent -75,25 -50,50
SO16 [mil]
  rect 80x26 smd: 1(0,0) 2(0,-50) 3(0,-100) 4(0,-150) 5(0,-200) 6(0,-250) 7(0,-300) 8(0,-350) 9(220,-350) 10(220,-300) 11(220,-250) 12(220,-200) 13(220,-150) 14(220,-100) 15(220,-50) 16(220,0)
  silkscreen extent -75,-375 155,50
SOIC4 [mm]
  rect 2x0.66 smd: 1(-2.8,0.635) 2(-2.8,-0.635) 3(2.8,-0.635) 4(2.8,0.635)
  silkscreen extent -1.32,-2.3 1.33,2.3, body extent -1.5,-2.3 1.5,2.3, height 2.1
SOL18 [mil]
  rect 80x26 smd: 1(0,0) 2(0,-50) 3(0,-100) 4(0,-150) 5(0,-200) 6(0,-250) 7(0,-300) 8(0,-350) 9(0,-400) 10(380,-400) 11(380,-350) 12(380,-300) 13(380,-250) 14(380,-200) 15(380,-150) 16(380,-100) 17(380,-50) 18(380,0)
  silkscreen extent -75,25 -50,50
SOT23 [mm]
  rect 1.5x2 smd: 1(0,0) 2(2.3,0) 3(4.6,0)
  rect 3.8x2 smd: 4(2.3,6.8)
  silkscreen extent -1.3,0 5.9,6.5
SOT23-6 [mm] "SOT23, 6-Leads, Body 2,90x2,75mm, Pitch 0,95mm, IPC Medium Density"
  rect 1.1x0.7 smd: 1(-1.35,0.95) 2(-1.35,0) 3(-1.35,-0.95) 4(1.35,-0.95) 5(1.35,0) 6(1.35,0.95)
  silkscreen extent -0.5,-1.55 0.5,1.55, body extent -1.5,-1.55 1.5,1.55, height 1.25
SOT-23 [mil]
  rect 44x44 smd: 1(0,0) 2(80,0) 3(40,87)
SWT-1 [mm]
  round 2 hole 1.3: 1(0,0) 2(6.5,0)
  silkscreen extent 0.13,-1.75 6.5,1.75

## Free pads (board coordinates)
  round 1.5 hole 1: 0(107.159,37.237)
  round 1.5 hole 1 mask+0.1: 2(116.713,81.026) 3(114.173,81.026) 4(109.093,81.026) 5(106.68,81.026)
  round 0 hole 3.2 unplated mask+0.1: 6(89.595,76.459) 7(147.5,27.5) 8(147.595,76.459) 9(89.5,27.5)
  round 0.6 hole 0.3 mask+0.1: 10(108.458,62.23) 11(100.711,62.865) 12(116.332,62.865) 13(113.157,62.865) 14(112.649,63.5) 15(116.332,60.706) 16(122.174,49.149) 17(122.174,48.26) 18(122.174,47.244) 19(112.141,42.799) 20(106.553,43.434) 21(106.807,41.148) 22(94.996,49.53)

## Via types
v1: diameter 0.6, hole 0.3, Top Layer to Bottom Layer, 149 vias
v2: diameter 0.813, hole 0.406, Top Layer to Bottom Layer, 130 vias
v3: diameter 1, hole 0.6, Top Layer to Bottom Layer, 118 vias
v4: diameter 1.016, hole 0.61, Top Layer to Bottom Layer, 72 vias

## Nets (pads, with @x,y where several pads share a name; then routed paths per layer and width w, separated by ;. In a path a pad name is that pad's centre, name@x,y a point inside that pad or via, vN(x,y) a via of type N, cw(c..) or ccw(c..) an arc to the next point about the centre after c; other vN are vias at no path point)
05V_1: C25.2 C55.2 C56.2 C57.2 C58.2 C60.2 C62.2 C63.2 C64.2 C65.2 C66.2 DA6.4 DA7.4 DA8.5 DA9.1 DA10.3 DA11.3 DA11.4 DA12.3 DA12.4 R141.1 R205.1 VD44.2 VD45.2 X51.2 X51.4 | length 40.4
  Top Layer w0.508: C66.2@122.425,12.702 122.425,11.687 122.555,11.557 v3(122.555,11.049) DA12.4@122.555,9.944 ; C65.2@122.55,4.322 v3(122.55,5.715) DA12.3@122.55,7.239 ; DA8.5@133.731,18.161 133.731,16.891 134.112,16.51 v3(134.112,16.002) ; C60.2@141.221,18.163 v3(143.254,18.163) 143.637,17.78 145.288,17.78 ; VD44.2@145.288,16.51 145.288,17.78 ; VD45.2@145.288,19.05 145.288,17.78 ; v3(169.545,16.256) DA6.4@170.434,16.256 ; C64.2@177.167,7.115 178.306,7.115 v3(178.559,7.369) 179.131,7.94 DA11.3@180.006,7.94 ; DA11.4@182.706,7.94 v3(183.896,7.94) 185.104,7.94 C63.2@185.168,8.004
  Top Layer w0.813: v2(127,16.256) DA7.4@128.143,16.256 ; R141.1@131.216,4.316 132.713,4.316 v3(132.715,4.318)
  Top Layer w1.016: DA10.3@161.671,23.114 163.957,23.114 165.354,24.511 DA9.1@168.783,24.511 ; R205.1@172.999,4.316 174.496,4.316 v3(174.498,4.318)
  Bottom Layer w0.508: v3(128.143,13.208) 129.033,13.208
  Bottom Layer w0.813: C56.2@129.035,11.559 C55.2@129.035,14.861 ; C57.2@171.453,11.813 C58.2@171.453,14.861
024v_1: J1.1 J2.2 J3.2 J4.2 J5.2 J25.2 J26.2 X1.5 X2.5 X3.5 X4.5 X5.5 X6.5 X6.11 X6.17 X7.5 X7.11 X7.17 X8.5 X8.11 X8.17 X9.5 X9.11 X9.17 X10.5 X10.11 X10.17 X11.5 X11.11 X11.17 X12.5 X12.11 X12.17 X24.5 X25.5 X52.1 | length 191
  Top Layer w0.508: v3(18.69,13.975) 22.627,13.975 v4(24.405,15.753) ; v3(18.69,27.056) 21.738,27.056 v4(24.405,29.723) ; v3(18.69,41.661) 22.881,41.661 v4(24.405,43.185) ; v3(18.69,55.377) 22.754,55.377 v4(24.405,57.028) ; v3(18.69,68.712) 22.373,68.712 v4(24.405,70.744) ; v3(18.69,81.92) 22.5,81.92 v4(24.405,83.825)
  Bottom Layer w0.508: v3(24.376,2.687) 24.391,2.672 24.405,2.672 24.405,4.577 ; X12.17@25.675,4.577 24.405,4.577 ; X12.11@25.675,8.387 24.405,8.387 ; X12.5@25.675,12.197 24.405,12.197 ; X11.17@25.675,18.42 24.405,18.42 ; X11.11@25.675,22.23 24.405,22.23 ; X11.5@25.675,26.04 24.405,26.04 ; X10.17@25.675,31.755 24.405,31.755 ; X10.11@25.675,35.565 24.405,35.565 ; X10.5@25.675,39.375 24.405,39.375 ; X9.17@25.675,45.725 24.405,45.725 ; X9.11@25.675,49.535 24.405,49.535 ; X9.5@25.675,53.345 24.405,53.345 ; X8.17@25.675,59.314 24.405,59.314 ; X8.11@25.675,63.124 24.405,63.124 ; X8.5@25.675,66.934 24.405,66.934 ; X7.17@25.675,73.03 24.405,73.03 ; X7.11@25.675,76.84 24.405,76.84 ; X7.5@25.675,80.65 24.405,80.65 ; X6.17@25.675,86.746 24.405,86.746 ; X6.11@25.675,90.556 24.405,90.556 ; X6.5@25.675,94.366 24.405,94.366 24.405,90.556 ; 24.405,4.577 24.405,8.387 ; 24.405,8.387 24.405,12.197 ; 24.405,12.197 v4(24.405,15.753) 24.405,18.42 ; 24.405,18.42 24.405,22.23 ; 24.405,22.23 24.405,26.04 ; 24.405,26.04 v4(24.405,29.723) 24.405,31.755 ; 24.405,31.755 24.405,35.565 ; 24.405,35.565 24.405,39.375 ; 24.405,39.375 v4(24.405,43.185) 24.405,45.725 ; 24.405,45.725 24.405,49.535 ; 24.405,49.535 24.405,53.345 ; 24.405,53.345 v4(24.405,57.028) 24.405,59.314 ; 24.405,59.314 24.405,63.124 ; 24.405,63.124 24.405,66.934 ; 24.405,66.934 v4(24.405,70.744) 24.405,73.03 ; 24.405,73.03 24.405,76.84 ; 24.405,76.84 24.405,80.65 ; 24.405,80.65 v4(24.405,83.825) 24.405,86.746 ; 24.405,86.746 24.405,90.556
  Bottom Layer w0.813: J26.2@4.082,9.02 5.48,9.02 6.117,8.383 X25.5@6.117,6.228 ; J5.2@4.082,36.452 5.103,36.452 6.117,35.438 X5.5@6.117,33.025 ; J4.2@4.082,50.041 5.48,50.041 6.117,49.404 X4.5@6.117,46.487 ; J3.2@4.082,63.503 5.226,63.503 6.117,62.612 X3.5@6.117,60.203 ; J2.2@4.082,77.092 5.099,77.092 6.117,76.074 X2.5@6.117,73.792 ; J1.1@4.11,90.304 5.226,90.304 6.117,89.413 X1.5@6.117,87.127 ; J25.2@4.209,22.736 5.23,22.736 6.117,21.849 X24.5@6.117,19.309
  other v4: 11.959,1.021 17.039,1.021 4.085,2.672 7.895,2.672